# EAGLE board NCP1402-5V_Breakout-Panel-v10 (EAGLE 6.5.0), part 1 of 2
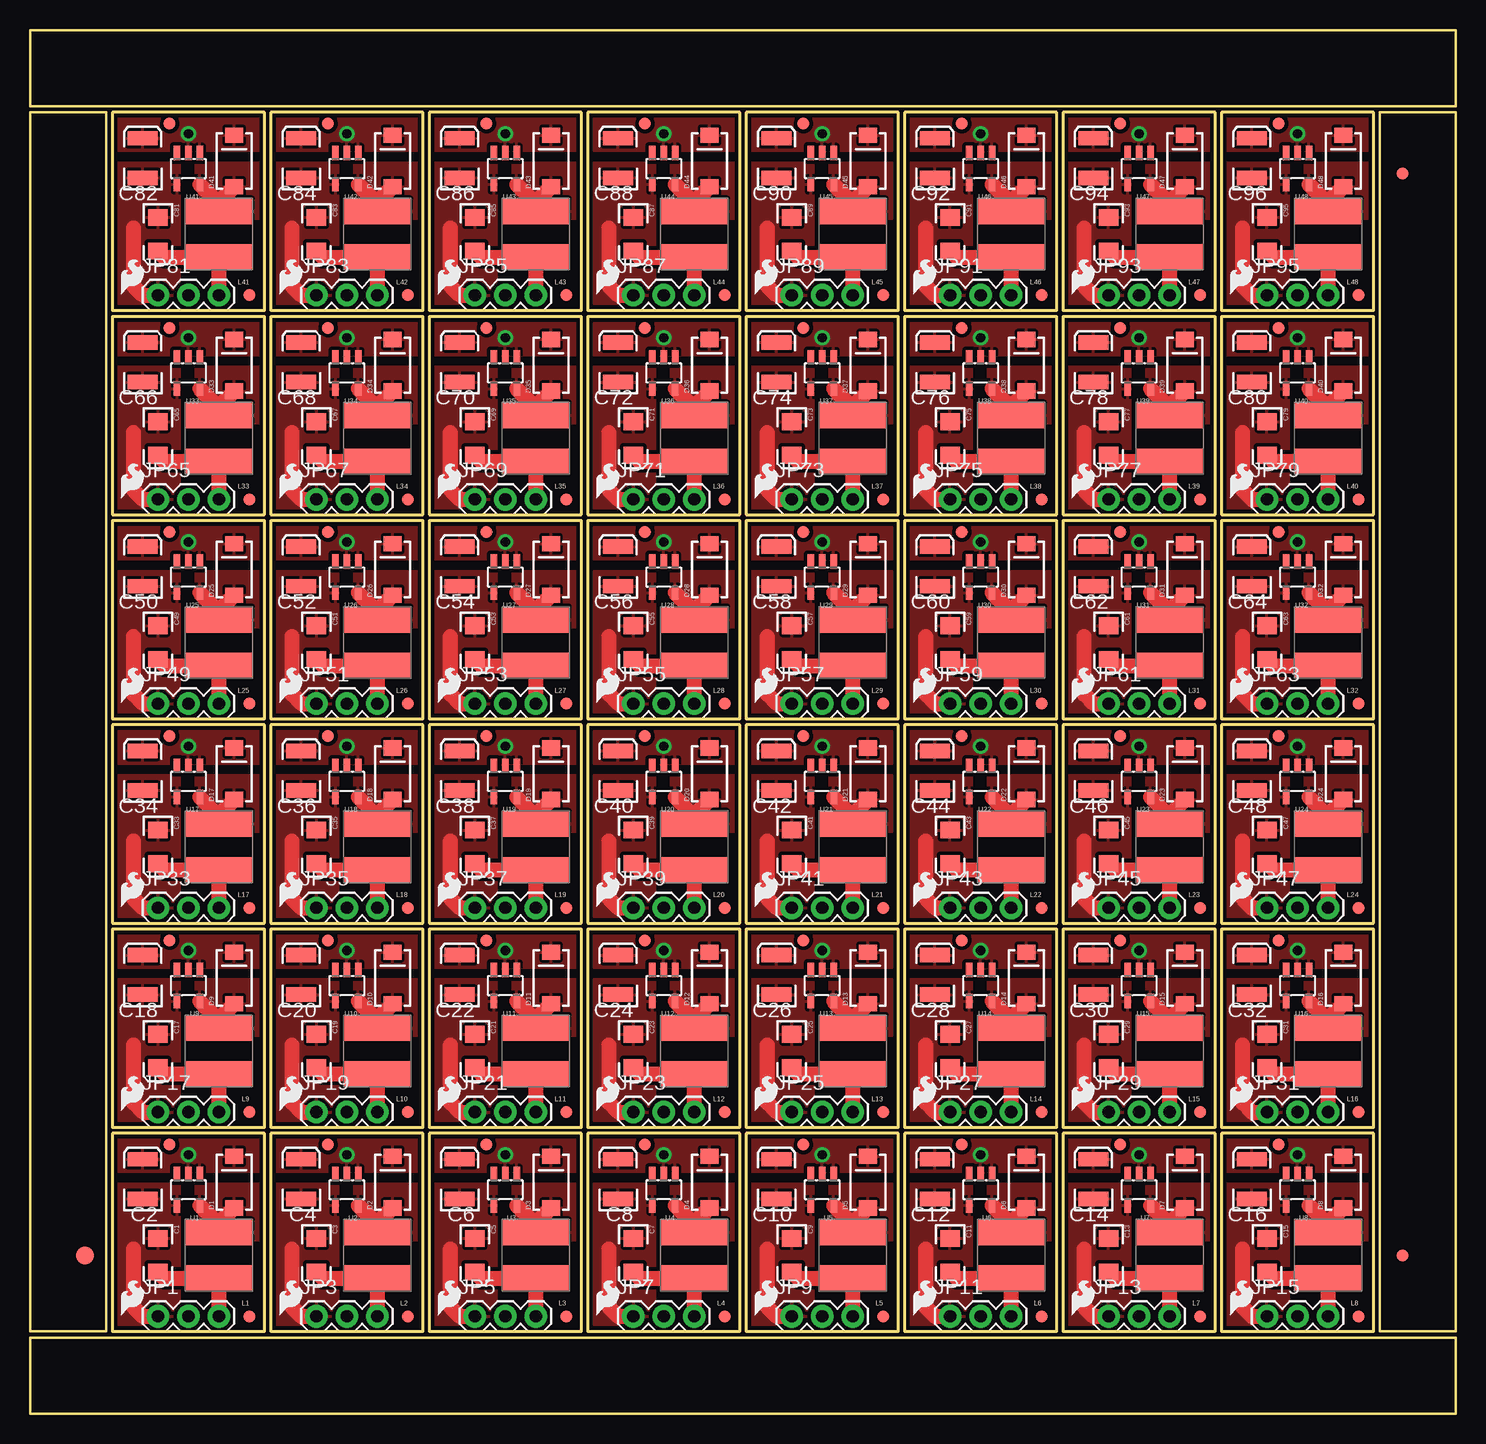
[diagram p0: board, top side]
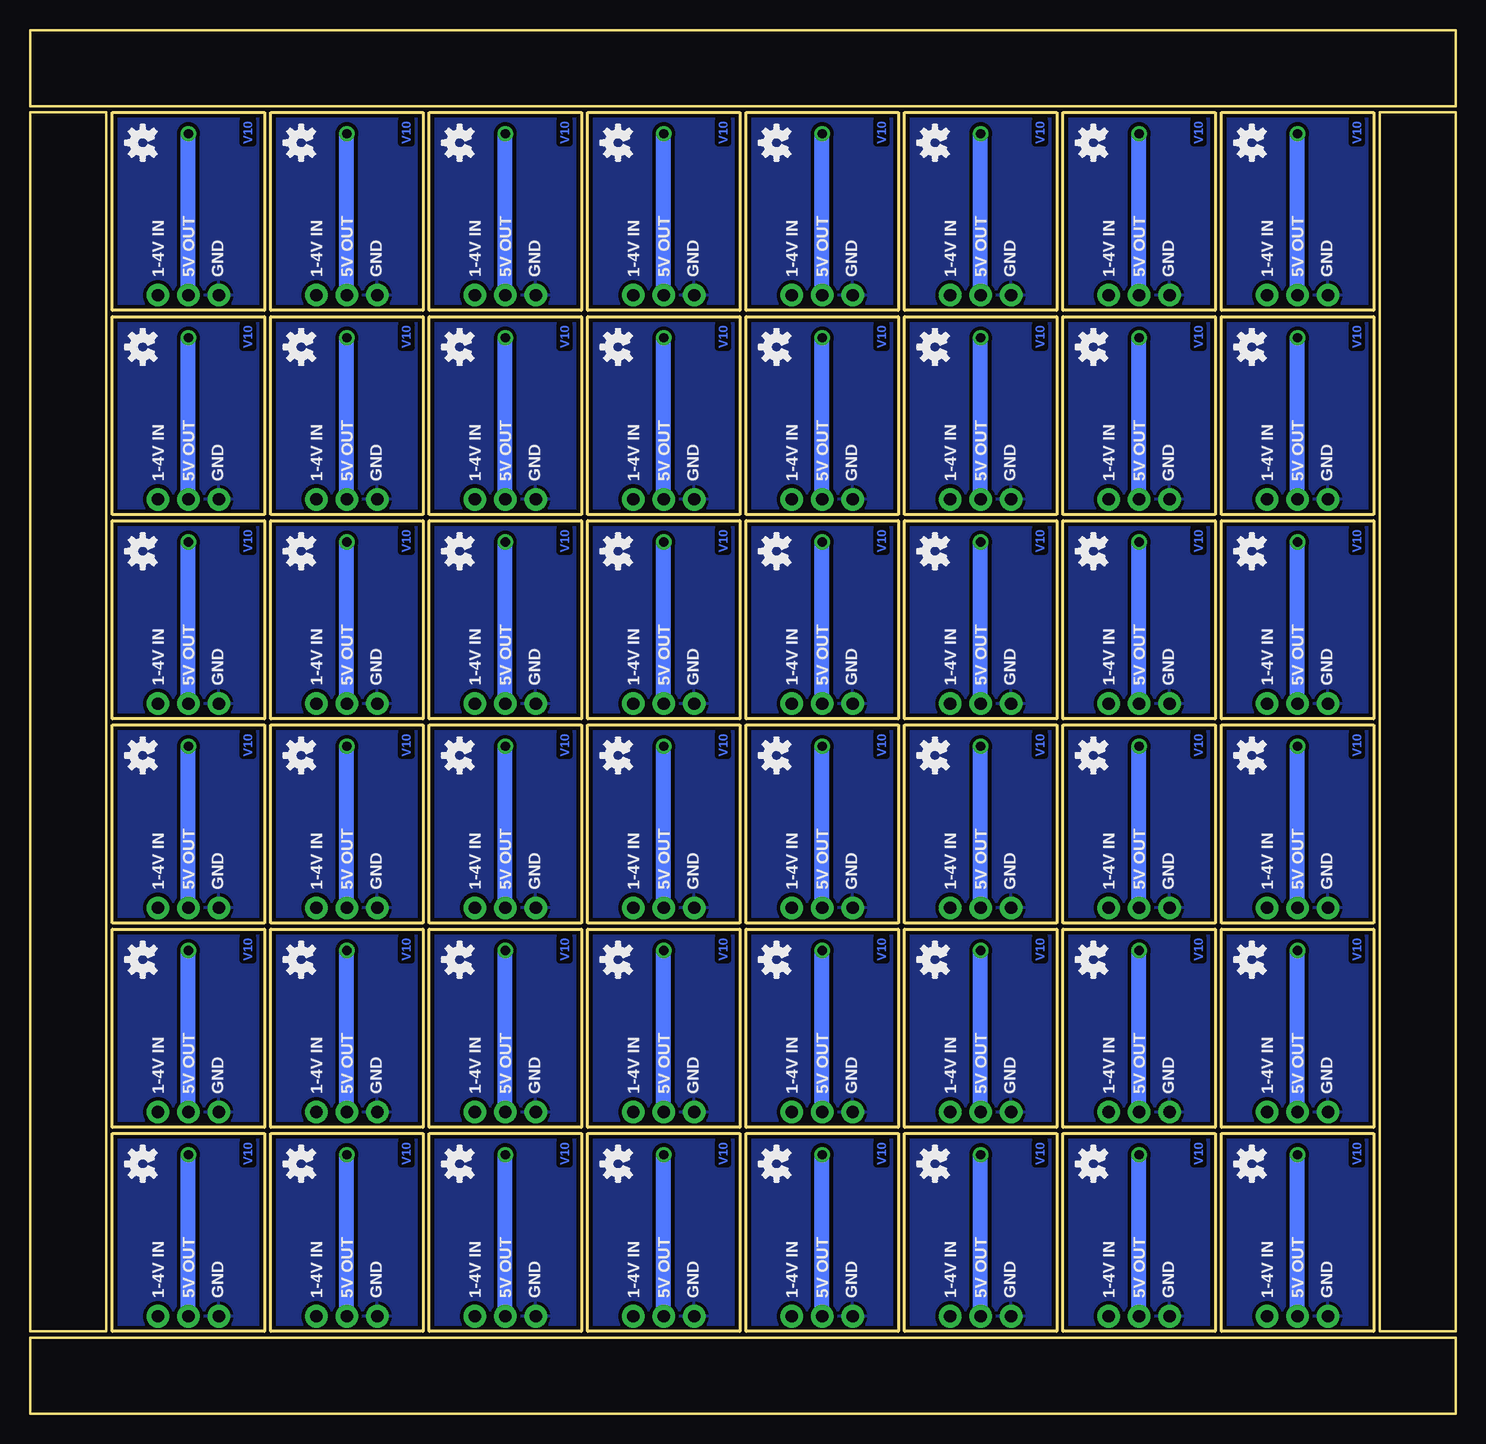
[diagram p1: board, bottom side, seen from below]

Size 118.87 x 115.32 mm. Coordinates in mm from the lower left corner, seen from the top.
Outline: 6.86,6.86 19.56,6.86 19.56,23.37 6.86,23.37 6.86,6.86
Outline: 20.07,6.86 32.77,6.86 32.77,23.37 20.07,23.37 20.07,6.86
Outline: 33.27,6.86 45.97,6.86 45.97,23.37 33.27,23.37 33.27,6.86
Outline: 46.48,6.86 59.18,6.86 59.18,23.37 46.48,23.37 46.48,6.86
Outline: 59.69,6.86 72.39,6.86 72.39,23.37 59.69,23.37 59.69,6.86
Outline: 72.9,6.86 85.6,6.86 85.6,23.37 72.9,23.37 72.9,6.86
Outline: 86.11,6.86 98.81,6.86 98.81,23.37 86.11,23.37 86.11,6.86
Outline: 99.31,6.86 112.01,6.86 112.01,23.37 99.31,23.37 99.31,6.86
Outline: 6.86,23.88 19.56,23.88 19.56,40.39 6.86,40.39 6.86,23.88
Outline: 20.07,23.88 32.77,23.88 32.77,40.39 20.07,40.39 20.07,23.88
Outline: 33.27,23.88 45.97,23.88 45.97,40.39 33.27,40.39 33.27,23.88
Outline: 46.48,23.88 59.18,23.88 59.18,40.39 46.48,40.39 46.48,23.88
Outline: 59.69,23.88 72.39,23.88 72.39,40.39 59.69,40.39 59.69,23.88
Outline: 72.9,23.88 85.6,23.88 85.6,40.39 72.9,40.39 72.9,23.88
Outline: 86.11,23.88 98.81,23.88 98.81,40.39 86.11,40.39 86.11,23.88
Outline: 99.31,23.88 112.01,23.88 112.01,40.39 99.31,40.39 99.31,23.88
Outline: 6.86,40.89 19.56,40.89 19.56,57.4 6.86,57.4 6.86,40.89
Outline: 20.07,40.89 32.77,40.89 32.77,57.4 20.07,57.4 20.07,40.89
Outline: 33.27,40.89 45.97,40.89 45.97,57.4 33.27,57.4 33.27,40.89
Outline: 46.48,40.89 59.18,40.89 59.18,57.4 46.48,57.4 46.48,40.89
Outline: 59.69,40.89 72.39,40.89 72.39,57.4 59.69,57.4 59.69,40.89
Outline: 72.9,40.89 85.6,40.89 85.6,57.4 72.9,57.4 72.9,40.89
Outline: 86.11,40.89 98.81,40.89 98.81,57.4 86.11,57.4 86.11,40.89
Outline: 99.31,40.89 112.01,40.89 112.01,57.4 99.31,57.4 99.31,40.89
Outline: 6.86,57.91 19.56,57.91 19.56,74.42 6.86,74.42 6.86,57.91
Outline: 20.07,57.91 32.77,57.91 32.77,74.42 20.07,74.42 20.07,57.91
Outline: 33.27,57.91 45.97,57.91 45.97,74.42 33.27,74.42 33.27,57.91
Outline: 46.48,57.91 59.18,57.91 59.18,74.42 46.48,74.42 46.48,57.91
Outline: 59.69,57.91 72.39,57.91 72.39,74.42 59.69,74.42 59.69,57.91
Outline: 72.9,57.91 85.6,57.91 85.6,74.42 72.9,74.42 72.9,57.91
Outline: 86.11,57.91 98.81,57.91 98.81,74.42 86.11,74.42 86.11,57.91
Outline: 99.31,57.91 112.01,57.91 112.01,74.42 99.31,74.42 99.31,57.91
Outline: 6.86,74.93 19.56,74.93 19.56,91.44 6.86,91.44 6.86,74.93
Outline: 20.07,74.93 32.77,74.93 32.77,91.44 20.07,91.44 20.07,74.93
Outline: 33.27,74.93 45.97,74.93 45.97,91.44 33.27,91.44 33.27,74.93
Outline: 46.48,74.93 59.18,74.93 59.18,91.44 46.48,91.44 46.48,74.93
Outline: 59.69,74.93 72.39,74.93 72.39,91.44 59.69,91.44 59.69,74.93
Outline: 72.9,74.93 85.6,74.93 85.6,91.44 72.9,91.44 72.9,74.93
Outline: 86.11,74.93 98.81,74.93 98.81,91.44 86.11,91.44 86.11,74.93
Outline: 99.31,74.93 112.01,74.93 112.01,91.44 99.31,91.44 99.31,74.93
Outline: 6.86,91.95 19.56,91.95 19.56,108.46 6.86,108.46 6.86,91.95
Outline: 20.07,91.95 32.77,91.95 32.77,108.46 20.07,108.46 20.07,91.95
Outline: 33.27,91.95 45.97,91.95 45.97,108.46 33.27,108.46 33.27,91.95
Outline: 46.48,91.95 59.18,91.95 59.18,108.46 46.48,108.46 46.48,91.95
Outline: 59.69,91.95 72.39,91.95 72.39,108.46 59.69,108.46 59.69,91.95
Outline: 72.9,91.95 85.6,91.95 85.6,108.46 72.9,108.46 72.9,91.95
Outline: 86.11,91.95 98.81,91.95 98.81,108.46 86.11,108.46 86.11,91.95
Outline: 99.31,91.95 112.01,91.95 112.01,108.46 99.31,108.46 99.31,91.95
Outline: 6.35,6.86 6.35,108.46 0,108.46 0,6.86 6.35,6.86
Outline: 0,0 118.87,0 118.87,6.35 0,6.35 0,0
Outline: 118.87,6.86 118.87,108.46 112.52,108.46 112.52,6.86 118.87,6.86
Outline: 118.87,115.32 0,115.32 0,108.97 118.87,108.97 118.87,115.32
Copper layers (1*16): Top 0.035mm / dielectric 1.5mm / Bottom 0.035mm
Design rules "SparkFun *": minimum track width 8mil, minimum drill 20mil, track to track 8mil, track to pad 8mil, pad to pad 8mil, via to via 8mil, smd to smd 8mil, copper to edge 8mil, drill to drill 8mil, minimum pad ring 12mil, minimum via ring 10mil, stop-mask expansion 4mil, vias tented up to drill 31mil, thermal gap 10mil

## Footprints (pad centres in the part's own frame; a part is rotated, then mirrored left to right if it is on the bottom)
EIA3216 = smd 1.4 x 1.6: A 1.4,0; C -1.4,0
EIA3528 = smd 1.2 x 2.5: A 1.65,0; C -1.65,0
SMA-DIODE = smd 1.27 x 1.47: A -2.15,0; C 2.15,0
FIDUCIAL-1.5X3 = smd 1.5 x 1.5: 1 0,0
FIDUCIAL-1X2 = smd 1 x 1: 1 0,0
1X03 = drill 1.016 pad 1.88: 1 0,0; 2 2.54,0; 3 5.08,0
CR54 = smd 5.5 x 2.15: P$1 0,1.92; P$2 0,-1.92
SOT23-5 = smd 0.55 x 1.2: 1 -0.95,-1.3; 2 0,-1.3; 3 0.95,-1.3; 4 0.95,1.3; 5 -0.95,1.3

## Placement (x,y rotation side)
C1  10uF  [EIA3216]  10.67,13.21 270 top
C2  68uF  [EIA3528]  9.4,19.56 90 top
C3  10uF  [EIA3216]  23.88,13.21 270 top
C4  68uF  [EIA3528]  22.61,19.56 90 top
C5  10uF  [EIA3216]  37.08,13.21 270 top
C6  68uF  [EIA3528]  35.81,19.56 90 top
C7  10uF  [EIA3216]  50.29,13.21 270 top
C8  68uF  [EIA3528]  49.02,19.56 90 top
C9  10uF  [EIA3216]  63.5,13.21 270 top
C10  68uF  [EIA3528]  62.23,19.56 90 top
C11  10uF  [EIA3216]  76.71,13.21 270 top
C12  68uF  [EIA3528]  75.44,19.56 90 top
C13  10uF  [EIA3216]  89.92,13.21 270 top
C14  68uF  [EIA3528]  88.65,19.56 90 top
C15  10uF  [EIA3216]  103.12,13.21 270 top
C16  68uF  [EIA3528]  101.85,19.56 90 top
C17  10uF  [EIA3216]  10.67,30.23 270 top
C18  68uF  [EIA3528]  9.4,36.58 90 top
C19  10uF  [EIA3216]  23.88,30.23 270 top
C20  68uF  [EIA3528]  22.61,36.58 90 top
C21  10uF  [EIA3216]  37.08,30.23 270 top
C22  68uF  [EIA3528]  35.81,36.58 90 top
C23  10uF  [EIA3216]  50.29,30.23 270 top
C24  68uF  [EIA3528]  49.02,36.58 90 top
C25  10uF  [EIA3216]  63.5,30.23 270 top
C26  68uF  [EIA3528]  62.23,36.58 90 top
C27  10uF  [EIA3216]  76.71,30.23 270 top
C28  68uF  [EIA3528]  75.44,36.58 90 top
C29  10uF  [EIA3216]  89.92,30.23 270 top
C30  68uF  [EIA3528]  88.65,36.58 90 top
C31  10uF  [EIA3216]  103.12,30.23 270 top
C32  68uF  [EIA3528]  101.85,36.58 90 top
C33  10uF  [EIA3216]  10.67,47.24 270 top
C34  68uF  [EIA3528]  9.4,53.59 90 top
C35  10uF  [EIA3216]  23.88,47.24 270 top
C36  68uF  [EIA3528]  22.61,53.59 90 top
C37  10uF  [EIA3216]  37.08,47.24 270 top
C38  68uF  [EIA3528]  35.81,53.59 90 top
C39  10uF  [EIA3216]  50.29,47.24 270 top
C40  68uF  [EIA3528]  49.02,53.59 90 top
C41  10uF  [EIA3216]  63.5,47.24 270 top
C42  68uF  [EIA3528]  62.23,53.59 90 top
C43  10uF  [EIA3216]  76.71,47.24 270 top
C44  68uF  [EIA3528]  75.44,53.59 90 top
C45  10uF  [EIA3216]  89.92,47.24 270 top
C46  68uF  [EIA3528]  88.65,53.59 90 top
C47  10uF  [EIA3216]  103.12,47.24 270 top
C48  68uF  [EIA3528]  101.85,53.59 90 top
C49  10uF  [EIA3216]  10.67,64.26 270 top
C50  68uF  [EIA3528]  9.4,70.61 90 top
C51  10uF  [EIA3216]  23.88,64.26 270 top
C52  68uF  [EIA3528]  22.61,70.61 90 top
C53  10uF  [EIA3216]  37.08,64.26 270 top
C54  68uF  [EIA3528]  35.81,70.61 90 top
C55  10uF  [EIA3216]  50.29,64.26 270 top
C56  68uF  [EIA3528]  49.02,70.61 90 top
C57  10uF  [EIA3216]  63.5,64.26 270 top
C58  68uF  [EIA3528]  62.23,70.61 90 top
C59  10uF  [EIA3216]  76.71,64.26 270 top
C60  68uF  [EIA3528]  75.44,70.61 90 top
C61  10uF  [EIA3216]  89.92,64.26 270 top
C62  68uF  [EIA3528]  88.65,70.61 90 top
C63  10uF  [EIA3216]  103.12,64.26 270 top
C64  68uF  [EIA3528]  101.85,70.61 90 top
C65  10uF  [EIA3216]  10.67,81.28 270 top
C66  68uF  [EIA3528]  9.4,87.63 90 top
C67  10uF  [EIA3216]  23.88,81.28 270 top
C68  68uF  [EIA3528]  22.61,87.63 90 top
C69  10uF  [EIA3216]  37.08,81.28 270 top
C70  68uF  [EIA3528]  35.81,87.63 90 top
C71  10uF  [EIA3216]  50.29,81.28 270 top
C72  68uF  [EIA3528]  49.02,87.63 90 top
C73  10uF  [EIA3216]  63.5,81.28 270 top
C74  68uF  [EIA3528]  62.23,87.63 90 top
C75  10uF  [EIA3216]  76.71,81.28 270 top
C76  68uF  [EIA3528]  75.44,87.63 90 top
C77  10uF  [EIA3216]  89.92,81.28 270 top
C78  68uF  [EIA3528]  88.65,87.63 90 top
C79  10uF  [EIA3216]  103.12,81.28 270 top
C80  68uF  [EIA3528]  101.85,87.63 90 top
C81  10uF  [EIA3216]  10.67,98.3 270 top
C82  68uF  [EIA3528]  9.4,104.65 90 top
C83  10uF  [EIA3216]  23.88,98.3 270 top
C84  68uF  [EIA3528]  22.61,104.65 90 top
C85  10uF  [EIA3216]  37.08,98.3 270 top
C86  68uF  [EIA3528]  35.81,104.65 90 top
C87  10uF  [EIA3216]  50.29,98.3 270 top
C88  68uF  [EIA3528]  49.02,104.65 90 top
C89  10uF  [EIA3216]  63.5,98.3 270 top
C90  68uF  [EIA3528]  62.23,104.65 90 top
C91  10uF  [EIA3216]  76.71,98.3 270 top
C92  68uF  [EIA3528]  75.44,104.65 90 top
C93  10uF  [EIA3216]  89.92,98.3 270 top
C94  68uF  [EIA3528]  88.65,104.65 90 top
C95  10uF  [EIA3216]  103.12,98.3 270 top
C96  68uF  [EIA3528]  101.85,104.65 90 top
D1  MBRA140  [SMA-DIODE]  17.02,19.3 90 top
D2  MBRA140  [SMA-DIODE]  30.23,19.3 90 top
D3  MBRA140  [SMA-DIODE]  43.43,19.3 90 top
D4  MBRA140  [SMA-DIODE]  56.64,19.3 90 top
D5  MBRA140  [SMA-DIODE]  69.85,19.3 90 top
D6  MBRA140  [SMA-DIODE]  83.06,19.3 90 top
D7  MBRA140  [SMA-DIODE]  96.27,19.3 90 top
D8  MBRA140  [SMA-DIODE]  109.47,19.3 90 top
D9  MBRA140  [SMA-DIODE]  17.02,36.32 90 top
D10  MBRA140  [SMA-DIODE]  30.23,36.32 90 top
D11  MBRA140  [SMA-DIODE]  43.43,36.32 90 top
D12  MBRA140  [SMA-DIODE]  56.64,36.32 90 top
D13  MBRA140  [SMA-DIODE]  69.85,36.32 90 top
D14  MBRA140  [SMA-DIODE]  83.06,36.32 90 top
D15  MBRA140  [SMA-DIODE]  96.27,36.32 90 top
D16  MBRA140  [SMA-DIODE]  109.47,36.32 90 top
D17  MBRA140  [SMA-DIODE]  17.02,53.34 90 top
D18  MBRA140  [SMA-DIODE]  30.23,53.34 90 top
D19  MBRA140  [SMA-DIODE]  43.43,53.34 90 top
D20  MBRA140  [SMA-DIODE]  56.64,53.34 90 top
D21  MBRA140  [SMA-DIODE]  69.85,53.34 90 top
D22  MBRA140  [SMA-DIODE]  83.06,53.34 90 top
D23  MBRA140  [SMA-DIODE]  96.27,53.34 90 top
D24  MBRA140  [SMA-DIODE]  109.47,53.34 90 top
D25  MBRA140  [SMA-DIODE]  17.02,70.36 90 top
D26  MBRA140  [SMA-DIODE]  30.23,70.36 90 top
D27  MBRA140  [SMA-DIODE]  43.43,70.36 90 top
D28  MBRA140  [SMA-DIODE]  56.64,70.36 90 top
D29  MBRA140  [SMA-DIODE]  69.85,70.36 90 top
D30  MBRA140  [SMA-DIODE]  83.06,70.36 90 top
D31  MBRA140  [SMA-DIODE]  96.27,70.36 90 top
D32  MBRA140  [SMA-DIODE]  109.47,70.36 90 top
D33  MBRA140  [SMA-DIODE]  17.02,87.38 90 top
D34  MBRA140  [SMA-DIODE]  30.23,87.38 90 top
D35  MBRA140  [SMA-DIODE]  43.43,87.38 90 top
D36  MBRA140  [SMA-DIODE]  56.64,87.38 90 top
D37  MBRA140  [SMA-DIODE]  69.85,87.38 90 top
D38  MBRA140  [SMA-DIODE]  83.06,87.38 90 top
D39  MBRA140  [SMA-DIODE]  96.27,87.38 90 top
D40  MBRA140  [SMA-DIODE]  109.47,87.38 90 top
D41  MBRA140  [SMA-DIODE]  17.02,104.39 90 top
D42  MBRA140  [SMA-DIODE]  30.23,104.39 90 top
D43  MBRA140  [SMA-DIODE]  43.43,104.39 90 top
D44  MBRA140  [SMA-DIODE]  56.64,104.39 90 top
D45  MBRA140  [SMA-DIODE]  69.85,104.39 90 top
D46  MBRA140  [SMA-DIODE]  83.06,104.39 90 top
D47  MBRA140  [SMA-DIODE]  96.27,104.39 90 top
D48  MBRA140  [SMA-DIODE]  109.47,104.39 90 top
E$1  [FIDUCIAL-1.5X3]  4.57,13.21 0 top
E$4  [FIDUCIAL-1X2]  114.43,13.21 0 top
E$5  [FIDUCIAL-1X2]  114.43,103.38 180 top
FID1  FIDUCIAL1X2  [FIDUCIAL-1X2]  18.29,8.13 0 top
FID2  FIDUCIAL1X2  [FIDUCIAL-1X2]  11.63,22.43 0 top
FID3  FIDUCIAL1X2  [FIDUCIAL-1X2]  31.5,8.13 0 top
FID4  FIDUCIAL1X2  [FIDUCIAL-1X2]  24.84,22.43 0 top
FID5  FIDUCIAL1X2  [FIDUCIAL-1X2]  44.7,8.13 0 top
FID6  FIDUCIAL1X2  [FIDUCIAL-1X2]  38.05,22.43 0 top
FID7  FIDUCIAL1X2  [FIDUCIAL-1X2]  57.91,8.13 0 top
FID8  FIDUCIAL1X2  [FIDUCIAL-1X2]  51.26,22.43 0 top
FID9  FIDUCIAL1X2  [FIDUCIAL-1X2]  71.12,8.13 0 top
FID10  FIDUCIAL1X2  [FIDUCIAL-1X2]  64.47,22.43 0 top
FID11  FIDUCIAL1X2  [FIDUCIAL-1X2]  84.33,8.13 0 top
FID12  FIDUCIAL1X2  [FIDUCIAL-1X2]  77.67,22.43 0 top
FID13  FIDUCIAL1X2  [FIDUCIAL-1X2]  97.54,8.13 0 top
FID14  FIDUCIAL1X2  [FIDUCIAL-1X2]  90.88,22.43 0 top
FID15  FIDUCIAL1X2  [FIDUCIAL-1X2]  110.74,8.13 0 top
FID16  FIDUCIAL1X2  [FIDUCIAL-1X2]  104.09,22.43 0 top
FID17  FIDUCIAL1X2  [FIDUCIAL-1X2]  18.29,25.15 0 top
FID18  FIDUCIAL1X2  [FIDUCIAL-1X2]  11.63,39.45 0 top
FID19  FIDUCIAL1X2  [FIDUCIAL-1X2]  31.5,25.15 0 top
FID20  FIDUCIAL1X2  [FIDUCIAL-1X2]  24.84,39.45 0 top
FID21  FIDUCIAL1X2  [FIDUCIAL-1X2]  44.7,25.15 0 top
FID22  FIDUCIAL1X2  [FIDUCIAL-1X2]  38.05,39.45 0 top
FID23  FIDUCIAL1X2  [FIDUCIAL-1X2]  57.91,25.15 0 top
FID24  FIDUCIAL1X2  [FIDUCIAL-1X2]  51.26,39.45 0 top
FID25  FIDUCIAL1X2  [FIDUCIAL-1X2]  71.12,25.15 0 top
FID26  FIDUCIAL1X2  [FIDUCIAL-1X2]  64.47,39.45 0 top
FID27  FIDUCIAL1X2  [FIDUCIAL-1X2]  84.33,25.15 0 top
FID28  FIDUCIAL1X2  [FIDUCIAL-1X2]  77.67,39.45 0 top
FID29  FIDUCIAL1X2  [FIDUCIAL-1X2]  97.54,25.15 0 top
FID30  FIDUCIAL1X2  [FIDUCIAL-1X2]  90.88,39.45 0 top
FID31  FIDUCIAL1X2  [FIDUCIAL-1X2]  110.74,25.15 0 top
FID32  FIDUCIAL1X2  [FIDUCIAL-1X2]  104.09,39.45 0 top
FID33  FIDUCIAL1X2  [FIDUCIAL-1X2]  18.29,42.16 0 top
FID34  FIDUCIAL1X2  [FIDUCIAL-1X2]  11.63,56.46 0 top
FID35  FIDUCIAL1X2  [FIDUCIAL-1X2]  31.5,42.16 0 top
FID36  FIDUCIAL1X2  [FIDUCIAL-1X2]  24.84,56.46 0 top
FID37  FIDUCIAL1X2  [FIDUCIAL-1X2]  44.7,42.16 0 top
FID38  FIDUCIAL1X2  [FIDUCIAL-1X2]  38.05,56.46 0 top
FID39  FIDUCIAL1X2  [FIDUCIAL-1X2]  57.91,42.16 0 top
FID40  FIDUCIAL1X2  [FIDUCIAL-1X2]  51.26,56.46 0 top
FID41  FIDUCIAL1X2  [FIDUCIAL-1X2]  71.12,42.16 0 top
FID42  FIDUCIAL1X2  [FIDUCIAL-1X2]  64.47,56.46 0 top
FID43  FIDUCIAL1X2  [FIDUCIAL-1X2]  84.33,42.16 0 top
FID44  FIDUCIAL1X2  [FIDUCIAL-1X2]  77.67,56.46 0 top
FID45  FIDUCIAL1X2  [FIDUCIAL-1X2]  97.54,42.16 0 top
FID46  FIDUCIAL1X2  [FIDUCIAL-1X2]  90.88,56.46 0 top
FID47  FIDUCIAL1X2  [FIDUCIAL-1X2]  110.74,42.16 0 top
FID48  FIDUCIAL1X2  [FIDUCIAL-1X2]  104.09,56.46 0 top
FID49  FIDUCIAL1X2  [FIDUCIAL-1X2]  18.29,59.18 0 top
FID50  FIDUCIAL1X2  [FIDUCIAL-1X2]  11.63,73.48 0 top
FID51  FIDUCIAL1X2  [FIDUCIAL-1X2]  31.5,59.18 0 top
FID52  FIDUCIAL1X2  [FIDUCIAL-1X2]  24.84,73.48 0 top
FID53  FIDUCIAL1X2  [FIDUCIAL-1X2]  44.7,59.18 0 top
FID54  FIDUCIAL1X2  [FIDUCIAL-1X2]  38.05,73.48 0 top
FID55  FIDUCIAL1X2  [FIDUCIAL-1X2]  57.91,59.18 0 top
FID56  FIDUCIAL1X2  [FIDUCIAL-1X2]  51.26,73.48 0 top
FID57  FIDUCIAL1X2  [FIDUCIAL-1X2]  71.12,59.18 0 top
FID58  FIDUCIAL1X2  [FIDUCIAL-1X2]  64.47,73.48 0 top
FID59  FIDUCIAL1X2  [FIDUCIAL-1X2]  84.33,59.18 0 top
FID60  FIDUCIAL1X2  [FIDUCIAL-1X2]  77.67,73.48 0 top
FID61  FIDUCIAL1X2  [FIDUCIAL-1X2]  97.54,59.18 0 top
FID62  FIDUCIAL1X2  [FIDUCIAL-1X2]  90.88,73.48 0 top
FID63  FIDUCIAL1X2  [FIDUCIAL-1X2]  110.74,59.18 0 top
FID64  FIDUCIAL1X2  [FIDUCIAL-1X2]  104.09,73.48 0 top
FID65  FIDUCIAL1X2  [FIDUCIAL-1X2]  18.29,76.2 0 top
FID66  FIDUCIAL1X2  [FIDUCIAL-1X2]  11.63,90.5 0 top
FID67  FIDUCIAL1X2  [FIDUCIAL-1X2]  31.5,76.2 0 top
FID68  FIDUCIAL1X2  [FIDUCIAL-1X2]  24.84,90.5 0 top
FID69  FIDUCIAL1X2  [FIDUCIAL-1X2]  44.7,76.2 0 top
FID70  FIDUCIAL1X2  [FIDUCIAL-1X2]  38.05,90.5 0 top
FID71  FIDUCIAL1X2  [FIDUCIAL-1X2]  57.91,76.2 0 top
FID72  FIDUCIAL1X2  [FIDUCIAL-1X2]  51.26,90.5 0 top
FID73  FIDUCIAL1X2  [FIDUCIAL-1X2]  71.12,76.2 0 top
FID74  FIDUCIAL1X2  [FIDUCIAL-1X2]  64.47,90.5 0 top
FID75  FIDUCIAL1X2  [FIDUCIAL-1X2]  84.33,76.2 0 top
FID76  FIDUCIAL1X2  [FIDUCIAL-1X2]  77.67,90.5 0 top
FID77  FIDUCIAL1X2  [FIDUCIAL-1X2]  97.54,76.2 0 top
FID78  FIDUCIAL1X2  [FIDUCIAL-1X2]  90.88,90.5 0 top
FID79  FIDUCIAL1X2  [FIDUCIAL-1X2]  110.74,76.2 0 top
FID80  FIDUCIAL1X2  [FIDUCIAL-1X2]  104.09,90.5 0 top
FID81  FIDUCIAL1X2  [FIDUCIAL-1X2]  18.29,93.22 0 top
FID82  FIDUCIAL1X2  [FIDUCIAL-1X2]  11.63,107.52 0 top
FID83  FIDUCIAL1X2  [FIDUCIAL-1X2]  31.5,93.22 0 top
FID84  FIDUCIAL1X2  [FIDUCIAL-1X2]  24.84,107.52 0 top
FID85  FIDUCIAL1X2  [FIDUCIAL-1X2]  44.7,93.22 0 top
FID86  FIDUCIAL1X2  [FIDUCIAL-1X2]  38.05,107.52 0 top
FID87  FIDUCIAL1X2  [FIDUCIAL-1X2]  57.91,93.22 0 top
FID88  FIDUCIAL1X2  [FIDUCIAL-1X2]  51.26,107.52 0 top
FID89  FIDUCIAL1X2  [FIDUCIAL-1X2]  71.12,93.22 0 top
FID90  FIDUCIAL1X2  [FIDUCIAL-1X2]  64.47,107.52 0 top
FID91  FIDUCIAL1X2  [FIDUCIAL-1X2]  84.33,93.22 0 top
FID92  FIDUCIAL1X2  [FIDUCIAL-1X2]  77.67,107.52 0 top
FID93  FIDUCIAL1X2  [FIDUCIAL-1X2]  97.54,93.22 0 top
FID94  FIDUCIAL1X2  [FIDUCIAL-1X2]  90.88,107.52 0 top
FID95  FIDUCIAL1X2  [FIDUCIAL-1X2]  110.74,93.22 0 top
FID96  FIDUCIAL1X2  [FIDUCIAL-1X2]  104.09,107.52 0 top
JP1  [1X03]  10.67,8.13 0 top
JP2  LOGO-SFESK  [SFE-LOGO-FLAME]  7.62,8.26 0 top
JP3  [1X03]  23.88,8.13 0 top
JP4  LOGO-SFESK  [SFE-LOGO-FLAME]  20.83,8.26 0 top
JP5  [1X03]  37.08,8.13 0 top
JP6  LOGO-SFESK  [SFE-LOGO-FLAME]  34.04,8.26 0 top
JP7  [1X03]  50.29,8.13 0 top
JP8  LOGO-SFESK  [SFE-LOGO-FLAME]  47.24,8.26 0 top
JP9  [1X03]  63.5,8.13 0 top
JP10  LOGO-SFESK  [SFE-LOGO-FLAME]  60.45,8.26 0 top
JP11  [1X03]  76.71,8.13 0 top
JP12  LOGO-SFESK  [SFE-LOGO-FLAME]  73.66,8.26 0 top
JP13  [1X03]  89.92,8.13 0 top
JP14  LOGO-SFESK  [SFE-LOGO-FLAME]  86.87,8.26 0 top
JP15  [1X03]  103.12,8.13 0 top
JP16  LOGO-SFESK  [SFE-LOGO-FLAME]  100.08,8.26 0 top
JP17  [1X03]  10.67,25.15 0 top
JP18  LOGO-SFESK  [SFE-LOGO-FLAME]  7.62,25.27 0 top
JP19  [1X03]  23.88,25.15 0 top
JP20  LOGO-SFESK  [SFE-LOGO-FLAME]  20.83,25.27 0 top
JP21  [1X03]  37.08,25.15 0 top
JP22  LOGO-SFESK  [SFE-LOGO-FLAME]  34.04,25.27 0 top
JP23  [1X03]  50.29,25.15 0 top
JP24  LOGO-SFESK  [SFE-LOGO-FLAME]  47.24,25.27 0 top
JP25  [1X03]  63.5,25.15 0 top
JP26  LOGO-SFESK  [SFE-LOGO-FLAME]  60.45,25.27 0 top
JP27  [1X03]  76.71,25.15 0 top
JP28  LOGO-SFESK  [SFE-LOGO-FLAME]  73.66,25.27 0 top
JP29  [1X03]  89.92,25.15 0 top
JP30  LOGO-SFESK  [SFE-LOGO-FLAME]  86.87,25.27 0 top
JP31  [1X03]  103.12,25.15 0 top
JP32  LOGO-SFESK  [SFE-LOGO-FLAME]  100.08,25.27 0 top
JP33  [1X03]  10.67,42.16 0 top
JP34  LOGO-SFESK  [SFE-LOGO-FLAME]  7.62,42.29 0 top
JP35  [1X03]  23.88,42.16 0 top
JP36  LOGO-SFESK  [SFE-LOGO-FLAME]  20.83,42.29 0 top
JP37  [1X03]  37.08,42.16 0 top
JP38  LOGO-SFESK  [SFE-LOGO-FLAME]  34.04,42.29 0 top
JP39  [1X03]  50.29,42.16 0 top
JP40  LOGO-SFESK  [SFE-LOGO-FLAME]  47.24,42.29 0 top
JP41  [1X03]  63.5,42.16 0 top
JP42  LOGO-SFESK  [SFE-LOGO-FLAME]  60.45,42.29 0 top
JP43  [1X03]  76.71,42.16 0 top
JP44  LOGO-SFESK  [SFE-LOGO-FLAME]  73.66,42.29 0 top
JP45  [1X03]  89.92,42.16 0 top
JP46  LOGO-SFESK  [SFE-LOGO-FLAME]  86.87,42.29 0 top
JP47  [1X03]  103.12,42.16 0 top
JP48  LOGO-SFESK  [SFE-LOGO-FLAME]  100.08,42.29 0 top
JP49  [1X03]  10.67,59.18 0 top
JP50  LOGO-SFESK  [SFE-LOGO-FLAME]  7.62,59.31 0 top
JP51  [1X03]  23.88,59.18 0 top
JP52  LOGO-SFESK  [SFE-LOGO-FLAME]  20.83,59.31 0 top
JP53  [1X03]  37.08,59.18 0 top
JP54  LOGO-SFESK  [SFE-LOGO-FLAME]  34.04,59.31 0 top
JP55  [1X03]  50.29,59.18 0 top
JP56  LOGO-SFESK  [SFE-LOGO-FLAME]  47.24,59.31 0 top
JP57  [1X03]  63.5,59.18 0 top
JP58  LOGO-SFESK  [SFE-LOGO-FLAME]  60.45,59.31 0 top
JP59  [1X03]  76.71,59.18 0 top
JP60  LOGO-SFESK  [SFE-LOGO-FLAME]  73.66,59.31 0 top
JP61  [1X03]  89.92,59.18 0 top
JP62  LOGO-SFESK  [SFE-LOGO-FLAME]  86.87,59.31 0 top
JP63  [1X03]  103.12,59.18 0 top
JP64  LOGO-SFESK  [SFE-LOGO-FLAME]  100.08,59.31 0 top
JP65  [1X03]  10.67,76.2 0 top
JP66  LOGO-SFESK  [SFE-LOGO-FLAME]  7.62,76.33 0 top
JP67  [1X03]  23.88,76.2 0 top
JP68  LOGO-SFESK  [SFE-LOGO-FLAME]  20.83,76.33 0 top
JP69  [1X03]  37.08,76.2 0 top
JP70  LOGO-SFESK  [SFE-LOGO-FLAME]  34.04,76.33 0 top
JP71  [1X03]  50.29,76.2 0 top
JP72  LOGO-SFESK  [SFE-LOGO-FLAME]  47.24,76.33 0 top
JP73  [1X03]  63.5,76.2 0 top
JP74  LOGO-SFESK  [SFE-LOGO-FLAME]  60.45,76.33 0 top
JP75  [1X03]  76.71,76.2 0 top
JP76  LOGO-SFESK  [SFE-LOGO-FLAME]  73.66,76.33 0 top
JP77  [1X03]  89.92,76.2 0 top
JP78  LOGO-SFESK  [SFE-LOGO-FLAME]  86.87,76.33 0 top
JP79  [1X03]  103.12,76.2 0 top
JP80  LOGO-SFESK  [SFE-LOGO-FLAME]  100.08,76.33 0 top
JP81  [1X03]  10.67,93.22 0 top
JP82  LOGO-SFESK  [SFE-LOGO-FLAME]  7.62,93.34 0 top
JP83  [1X03]  23.88,93.22 0 top
JP84  LOGO-SFESK  [SFE-LOGO-FLAME]  20.83,93.34 0 top
JP85  [1X03]  37.08,93.22 0 top
JP86  LOGO-SFESK  [SFE-LOGO-FLAME]  34.04,93.34 0 top
JP87  [1X03]  50.29,93.22 0 top
JP88  LOGO-SFESK  [SFE-LOGO-FLAME]  47.24,93.34 0 top
JP89  [1X03]  63.5,93.22 0 top
JP90  LOGO-SFESK  [SFE-LOGO-FLAME]  60.45,93.34 0 top
JP91  [1X03]  76.71,93.22 0 top
JP92  LOGO-SFESK  [SFE-LOGO-FLAME]  73.66,93.34 0 top
JP93  [1X03]  89.92,93.22 0 top
JP94  LOGO-SFESK  [SFE-LOGO-FLAME]  86.87,93.34 0 top
JP95  [1X03]  103.12,93.22 0 top
JP96  LOGO-SFESK  [SFE-LOGO-FLAME]  100.08,93.34 0 top
L1  47uH  [CR54]  15.75,13.21 180 top
L2  47uH  [CR54]  28.96,13.21 180 top
L3  47uH  [CR54]  42.16,13.21 180 top
L4  47uH  [CR54]  55.37,13.21 180 top
L5  47uH  [CR54]  68.58,13.21 180 top
L6  47uH  [CR54]  81.79,13.21 180 top
L7  47uH  [CR54]  95,13.21 180 top
L8  47uH  [CR54]  108.2,13.21 180 top
L9  47uH  [CR54]  15.75,30.23 180 top
L10  47uH  [CR54]  28.96,30.23 180 top
L11  47uH  [CR54]  42.16,30.23 180 top
L12  47uH  [CR54]  55.37,30.23 180 top
L13  47uH  [CR54]  68.58,30.23 180 top
L14  47uH  [CR54]  81.79,30.23 180 top
L15  47uH  [CR54]  95,30.23 180 top
L16  47uH  [CR54]  108.2,30.23 180 top
L17  47uH  [CR54]  15.75,47.24 180 top
L18  47uH  [CR54]  28.96,47.24 180 top
L19  47uH  [CR54]  42.16,47.24 180 top
L20  47uH  [CR54]  55.37,47.24 180 top
L21  47uH  [CR54]  68.58,47.24 180 top
L22  47uH  [CR54]  81.79,47.24 180 top
L23  47uH  [CR54]  95,47.24 180 top
L24  47uH  [CR54]  108.2,47.24 180 top
L25  47uH  [CR54]  15.75,64.26 180 top
L26  47uH  [CR54]  28.96,64.26 180 top
L27  47uH  [CR54]  42.16,64.26 180 top
L28  47uH  [CR54]  55.37,64.26 180 top
L29  47uH  [CR54]  68.58,64.26 180 top
L30  47uH  [CR54]  81.79,64.26 180 top
L31  47uH  [CR54]  95,64.26 180 top
L32  47uH  [CR54]  108.2,64.26 180 top
L33  47uH  [CR54]  15.75,81.28 180 top
L34  47uH  [CR54]  28.96,81.28 180 top
L35  47uH  [CR54]  42.16,81.28 180 top
L36  47uH  [CR54]  55.37,81.28 180 top
L37  47uH  [CR54]  68.58,81.28 180 top
L38  47uH  [CR54]  81.79,81.28 180 top
L39  47uH  [CR54]  95,81.28 180 top
L40  47uH  [CR54]  108.2,81.28 180 top
L41  47uH  [CR54]  15.75,98.3 180 top
L42  47uH  [CR54]  28.96,98.3 180 top
L43  47uH  [CR54]  42.16,98.3 180 top
L44  47uH  [CR54]  55.37,98.3 180 top
L45  47uH  [CR54]  68.58,98.3 180 top
L46  47uH  [CR54]  81.79,98.3 180 top
L47  47uH  [CR54]  95,98.3 180 top
L48  47uH  [CR54]  108.2,98.3 180 top
U1  NCP1402  [SOT23-5]  13.21,18.67 180 top
U2  NCP1402  [SOT23-5]  26.42,18.67 180 top
U3  NCP1402  [SOT23-5]  39.62,18.67 180 top
U4  NCP1402  [SOT23-5]  52.83,18.67 180 top
U5  NCP1402  [SOT23-5]  66.04,18.67 180 top
U6  NCP1402  [SOT23-5]  79.25,18.67 180 top
U7  NCP1402  [SOT23-5]  92.46,18.67 180 top
U8  NCP1402  [SOT23-5]  105.66,18.67 180 top
U9  NCP1402  [SOT23-5]  13.21,35.69 180 top
U10  NCP1402  [SOT23-5]  26.42,35.69 180 top
U11  NCP1402  [SOT23-5]  39.62,35.69 180 top
U12  NCP1402  [SOT23-5]  52.83,35.69 180 top
U13  NCP1402  [SOT23-5]  66.04,35.69 180 top
U14  NCP1402  [SOT23-5]  79.25,35.69 180 top
U15  NCP1402  [SOT23-5]  92.46,35.69 180 top
U16  NCP1402  [SOT23-5]  105.66,35.69 180 top
U17  NCP1402  [SOT23-5]  13.21,52.7 180 top
U18  NCP1402  [SOT23-5]  26.42,52.7 180 top
U19  NCP1402  [SOT23-5]  39.62,52.7 180 top
U20  NCP1402  [SOT23-5]  52.83,52.7 180 top
U21  NCP1402  [SOT23-5]  66.04,52.7 180 top
U22  NCP1402  [SOT23-5]  79.25,52.7 180 top
U23  NCP1402  [SOT23-5]  92.46,52.7 180 top
U24  NCP1402  [SOT23-5]  105.66,52.7 180 top
U25  NCP1402  [SOT23-5]  13.21,69.72 180 top
U26  NCP1402  [SOT23-5]  26.42,69.72 180 top
U27  NCP1402  [SOT23-5]  39.62,69.72 180 top
U28  NCP1402  [SOT23-5]  52.83,69.72 180 top
U29  NCP1402  [SOT23-5]  66.04,69.72 180 top
U30  NCP1402  [SOT23-5]  79.25,69.72 180 top
U31  NCP1402  [SOT23-5]  92.46,69.72 180 top
U32  NCP1402  [SOT23-5]  105.66,69.72 180 top
U33  NCP1402  [SOT23-5]  13.21,86.74 180 top
U34  NCP1402  [SOT23-5]  26.42,86.74 180 top
U35  NCP1402  [SOT23-5]  39.62,86.74 180 top
U36  NCP1402  [SOT23-5]  52.83,86.74 180 top
U37  NCP1402  [SOT23-5]  66.04,86.74 180 top
U38  NCP1402  [SOT23-5]  79.25,86.74 180 top
U39  NCP1402  [SOT23-5]  92.46,86.74 180 top
U40  NCP1402  [SOT23-5]  105.66,86.74 180 top
U41  NCP1402  [SOT23-5]  13.21,103.76 180 top
U42  NCP1402  [SOT23-5]  26.42,103.76 180 top
U43  NCP1402  [SOT23-5]  39.62,103.76 180 top
U44  NCP1402  [SOT23-5]  52.83,103.76 180 top
U45  NCP1402  [SOT23-5]  66.04,103.76 180 top
U46  NCP1402  [SOT23-5]  79.25,103.76 180 top
U47  NCP1402  [SOT23-5]  92.46,103.76 180 top
U48  NCP1402  [SOT23-5]  105.66,103.76 180 top
U$1  OSHW-LOGOS  [OSHW-LOGO-S]  17.02,20.83 90 bottom
U$2  OSHW-LOGOS  [OSHW-LOGO-S]  30.23,20.83 90 bottom
U$3  OSHW-LOGOS  [OSHW-LOGO-S]  43.43,20.83 90 bottom
U$4  OSHW-LOGOS  [OSHW-LOGO-S]  56.64,20.83 90 bottom
U$5  OSHW-LOGOS  [OSHW-LOGO-S]  69.85,20.83 90 bottom
U$6  OSHW-LOGOS  [OSHW-LOGO-S]  83.06,20.83 90 bottom
U$7  OSHW-LOGOS  [OSHW-LOGO-S]  96.27,20.83 90 bottom
U$8  OSHW-LOGOS  [OSHW-LOGO-S]  109.47,20.83 90 bottom
U$9  OSHW-LOGOS  [OSHW-LOGO-S]  17.02,37.85 90 bottom
U$10  OSHW-LOGOS  [OSHW-LOGO-S]  30.23,37.85 90 bottom
U$11  OSHW-LOGOS  [OSHW-LOGO-S]  43.43,37.85 90 bottom
U$12  OSHW-LOGOS  [OSHW-LOGO-S]  56.64,37.85 90 bottom
U$13  OSHW-LOGOS  [OSHW-LOGO-S]  69.85,37.85 90 bottom
U$14  OSHW-LOGOS  [OSHW-LOGO-S]  83.06,37.85 90 bottom
U$15  OSHW-LOGOS  [OSHW-LOGO-S]  96.27,37.85 90 bottom
U$16  OSHW-LOGOS  [OSHW-LOGO-S]  109.47,37.85 90 bottom
U$17  OSHW-LOGOS  [OSHW-LOGO-S]  17.02,54.86 90 bottom
U$18  OSHW-LOGOS  [OSHW-LOGO-S]  30.23,54.86 90 bottom
U$19  OSHW-LOGOS  [OSHW-LOGO-S]  43.43,54.86 90 bottom
U$20  OSHW-LOGOS  [OSHW-LOGO-S]  56.64,54.86 90 bottom
U$21  OSHW-LOGOS  [OSHW-LOGO-S]  69.85,54.86 90 bottom
U$22  OSHW-LOGOS  [OSHW-LOGO-S]  83.06,54.86 90 bottom
U$23  OSHW-LOGOS  [OSHW-LOGO-S]  96.27,54.86 90 bottom
U$24  OSHW-LOGOS  [OSHW-LOGO-S]  109.47,54.86 90 bottom
U$25  OSHW-LOGOS  [OSHW-LOGO-S]  17.02,71.88 90 bottom
U$26  OSHW-LOGOS  [OSHW-LOGO-S]  30.23,71.88 90 bottom
U$27  OSHW-LOGOS  [OSHW-LOGO-S]  43.43,71.88 90 bottom
U$28  OSHW-LOGOS  [OSHW-LOGO-S]  56.64,71.88 90 bottom
U$29  OSHW-LOGOS  [OSHW-LOGO-S]  69.85,71.88 90 bottom
U$30  OSHW-LOGOS  [OSHW-LOGO-S]  83.06,71.88 90 bottom
U$31  OSHW-LOGOS  [OSHW-LOGO-S]  96.27,71.88 90 bottom
U$32  OSHW-LOGOS  [OSHW-LOGO-S]  109.47,71.88 90 bottom
U$33  OSHW-LOGOS  [OSHW-LOGO-S]  17.02,88.9 90 bottom
U$34  OSHW-LOGOS  [OSHW-LOGO-S]  30.23,88.9 90 bottom
U$35  OSHW-LOGOS  [OSHW-LOGO-S]  43.43,88.9 90 bottom
U$36  OSHW-LOGOS  [OSHW-LOGO-S]  56.64,88.9 90 bottom
U$37  OSHW-LOGOS  [OSHW-LOGO-S]  69.85,88.9 90 bottom
U$38  OSHW-LOGOS  [OSHW-LOGO-S]  83.06,88.9 90 bottom
U$39  OSHW-LOGOS  [OSHW-LOGO-S]  96.27,88.9 90 bottom
U$40  OSHW-LOGOS  [OSHW-LOGO-S]  109.47,88.9 90 bottom
U$41  OSHW-LOGOS  [OSHW-LOGO-S]  17.02,105.92 90 bottom
U$42  OSHW-LOGOS  [OSHW-LOGO-S]  30.23,105.92 90 bottom
U$43  OSHW-LOGOS  [OSHW-LOGO-S]  43.43,105.92 90 bottom
U$44  OSHW-LOGOS  [OSHW-LOGO-S]  56.64,105.92 90 bottom
U$45  OSHW-LOGOS  [OSHW-LOGO-S]  69.85,105.92 90 bottom
U$46  OSHW-LOGOS  [OSHW-LOGO-S]  83.06,105.92 90 bottom
U$47  OSHW-LOGOS  [OSHW-LOGO-S]  96.27,105.92 90 bottom
U$48  OSHW-LOGOS  [OSHW-LOGO-S]  109.47,105.92 90 bottom

## Library data of the parts
C1-C96 D1-D48 JP2 JP4 JP6 JP8 JP10 JP12 JP14 JP16 JP18 JP20 JP22 JP24 JP26 JP28 JP30 JP32 JP34 JP36 JP38 JP40 JP42 JP44 JP46 JP48 JP50 JP52 JP54 JP56 JP58 JP60 JP62 JP64 JP66 JP68 JP70 JP72 JP74 JP76 JP78 JP80 JP82 JP84 JP86 JP88 JP90 JP92 JP94 JP96 L1-L48 U1-U48 U$1-U$48 = SparkFun
E$1 E$4 E$5 FID1-FID96 = SparkFun-Aesthetics
JP1 JP3 JP5 JP7 JP9 JP11 JP13 JP15 JP17 JP19 JP21 JP23 JP25 JP27 JP29 JP31 JP33 JP35 JP37 JP39 JP41 JP43 JP45 JP47 JP49 JP51 JP53 JP55 JP57 JP59 JP61 JP63 JP65 JP67 JP69 JP71 JP73 JP75 JP77 JP79 JP81 JP83 JP85 JP87 JP89 JP91 JP93 JP95 = SparkFun-Connectors

## Nets
GND: C1.C C2.C JP1.1 U1.4
GND1: C3.C C4.C JP3.1 U2.4
GND2: C5.C C6.C JP5.1 U3.4
GND3: C7.C C8.C JP7.1 U4.4
GND4: C9.C C10.C JP9.1 U5.4
GND5: C11.C C12.C JP11.1 U6.4
GND6: C13.C C14.C JP13.1 U7.4
GND7: C15.C C16.C JP15.1 U8.4
GND8: C17.C C18.C JP17.1 U9.4
GND9: C19.C C20.C JP19.1 U10.4
GND10: C21.C C22.C JP21.1 U11.4
GND11: C23.C C24.C JP23.1 U12.4
GND12: C25.C C26.C JP25.1 U13.4
GND13: C27.C C28.C JP27.1 U14.4
GND14: C29.C C30.C JP29.1 U15.4
GND15: C31.C C32.C JP31.1 U16.4
GND16: C33.C C34.C JP33.1 U17.4
GND17: C35.C C36.C JP35.1 U18.4
GND18: C37.C C38.C JP37.1 U19.4
GND19: C39.C C40.C JP39.1 U20.4
GND20: C41.C C42.C JP41.1 U21.4
GND21: C43.C C44.C JP43.1 U22.4
GND22: C45.C C46.C JP45.1 U23.4
GND23: C47.C C48.C JP47.1 U24.4
GND24: C49.C C50.C JP49.1 U25.4
GND25: C51.C C52.C JP51.1 U26.4
GND26: C53.C C54.C JP53.1 U27.4
GND27: C55.C C56.C JP55.1 U28.4
GND28: C57.C C58.C JP57.1 U29.4
GND29: C59.C C60.C JP59.1 U30.4
GND30: C61.C C62.C JP61.1 U31.4
GND31: C63.C C64.C JP63.1 U32.4
GND32: C65.C C66.C JP65.1 U33.4
GND33: C67.C C68.C JP67.1 U34.4
GND34: C69.C C70.C JP69.1 U35.4
GND35: C71.C C72.C JP71.1 U36.4
GND36: C73.C C74.C JP73.1 U37.4
GND37: C75.C C76.C JP75.1 U38.4
GND38: C77.C C78.C JP77.1 U39.4
GND39: C79.C C80.C JP79.1 U40.4
GND40: C81.C C82.C JP81.1 U41.4
GND41: C83.C C84.C JP83.1 U42.4
GND42: C85.C C86.C JP85.1 U43.4
GND43: C87.C C88.C JP87.1 U44.4
GND44: C89.C C90.C JP89.1 U45.4
GND45: C91.C C92.C JP91.1 U46.4
GND46: C93.C C94.C JP93.1 U47.4
GND47: C95.C C96.C JP95.1 U48.4
N$1: D2.A L2.P$2 U2.5
N$2: D3.A L3.P$2 U3.5
N$3: D1.A L1.P$2 U1.5
N$4: D4.A L4.P$2 U4.5
N$5: D5.A L5.P$2 U5.5
N$6: D6.A L6.P$2 U6.5
N$7: D7.A L7.P$2 U7.5
N$8: D8.A L8.P$2 U8.5
N$9: D9.A L9.P$2 U9.5
N$10: D10.A L10.P$2 U10.5
N$11: D11.A L11.P$2 U11.5
N$12: D12.A L12.P$2 U12.5
N$13: D13.A L13.P$2 U13.5
N$14: D14.A L14.P$2 U14.5
N$15: D15.A L15.P$2 U15.5
N$16: D16.A L16.P$2 U16.5
N$17: D17.A L17.P$2 U17.5
N$18: D18.A L18.P$2 U18.5
N$19: D19.A L19.P$2 U19.5
N$20: D20.A L20.P$2 U20.5
N$21: D21.A L21.P$2 U21.5
N$22: D22.A L22.P$2 U22.5
N$23: D23.A L23.P$2 U23.5
N$24: D24.A L24.P$2 U24.5
N$25: D25.A L25.P$2 U25.5
N$26: D26.A L26.P$2 U26.5
N$27: D27.A L27.P$2 U27.5
N$28: D28.A L28.P$2 U28.5
N$29: D29.A L29.P$2 U29.5
N$30: D30.A L30.P$2 U30.5
N$31: D31.A L31.P$2 U31.5
N$32: D32.A L32.P$2 U32.5
N$33: D33.A L33.P$2 U33.5
N$34: D34.A L34.P$2 U34.5
N$35: D35.A L35.P$2 U35.5
N$36: D36.A L36.P$2 U36.5
N$37: D37.A L37.P$2 U37.5
N$38: D38.A L38.P$2 U38.5
N$39: D39.A L39.P$2 U39.5
N$40: D40.A L40.P$2 U40.5
N$41: D41.A L41.P$2 U41.5
N$42: D42.A L42.P$2 U42.5
N$43: D43.A L43.P$2 U43.5
N$44: D44.A L44.P$2 U44.5
N$45: D45.A L45.P$2 U45.5
N$46: D46.A L46.P$2 U46.5
N$47: D47.A L47.P$2 U47.5
N$48: D48.A L48.P$2 U48.5
VIN: C1.A JP1.3 L1.P$1
VIN1: C3.A JP3.3 L2.P$1
VIN2: C5.A JP5.3 L3.P$1
VIN3: C7.A JP7.3 L4.P$1
VIN4: C9.A JP9.3 L5.P$1
VIN5: C11.A JP11.3 L6.P$1
VIN6: C13.A JP13.3 L7.P$1
VIN7: C15.A JP15.3 L8.P$1
VIN8: C17.A JP17.3 L9.P$1
VIN9: C19.A JP19.3 L10.P$1
VIN10: C21.A JP21.3 L11.P$1
VIN11: C23.A JP23.3 L12.P$1
VIN12: C25.A JP25.3 L13.P$1
VIN13: C27.A JP27.3 L14.P$1
VIN14: C29.A JP29.3 L15.P$1
VIN15: C31.A JP31.3 L16.P$1
VIN16: C33.A JP33.3 L17.P$1
VIN17: C35.A JP35.3 L18.P$1
VIN18: C37.A JP37.3 L19.P$1
VIN19: C39.A JP39.3 L20.P$1
VIN20: C41.A JP41.3 L21.P$1
VIN21: C43.A JP43.3 L22.P$1
VIN22: C45.A JP45.3 L23.P$1
VIN23: C47.A JP47.3 L24.P$1
VIN24: C49.A JP49.3 L25.P$1
VIN25: C51.A JP51.3 L26.P$1
VIN26: C53.A JP53.3 L27.P$1
VIN27: C55.A JP55.3 L28.P$1
VIN28: C57.A JP57.3 L29.P$1
VIN29: C59.A JP59.3 L30.P$1
VIN30: C61.A JP61.3 L31.P$1
VIN31: C63.A JP63.3 L32.P$1
VIN32: C65.A JP65.3 L33.P$1
VIN33: C67.A JP67.3 L34.P$1
VIN34: C69.A JP69.3 L35.P$1
VIN35: C71.A JP71.3 L36.P$1
VIN36: C73.A JP73.3 L37.P$1
VIN37: C75.A JP75.3 L38.P$1
VIN38: C77.A JP77.3 L39.P$1
VIN39: C79.A JP79.3 L40.P$1
VIN40: C81.A JP81.3 L41.P$1
VIN41: C83.A JP83.3 L42.P$1
VIN42: C85.A JP85.3 L43.P$1
VIN43: C87.A JP87.3 L44.P$1
VIN44: C89.A JP89.3 L45.P$1
VIN45: C91.A JP91.3 L46.P$1
VIN46: C93.A JP93.3 L47.P$1
VIN47: C95.A JP95.3 L48.P$1
VOUT: C2.A D1.C JP1.2 U1.1 U1.2
VOUT1: C4.A D2.C JP3.2 U2.1 U2.2
VOUT2: C6.A D3.C JP5.2 U3.1 U3.2
VOUT3: C8.A D4.C JP7.2 U4.1 U4.2
VOUT4: C10.A D5.C JP9.2 U5.1 U5.2
VOUT5: C12.A D6.C JP11.2 U6.1 U6.2
VOUT6: C14.A D7.C JP13.2 U7.1 U7.2
VOUT7: C16.A D8.C JP15.2 U8.1 U8.2
VOUT8: C18.A D9.C JP17.2 U9.1 U9.2
VOUT9: C20.A D10.C JP19.2 U10.1 U10.2
VOUT10: C22.A D11.C JP21.2 U11.1 U11.2
VOUT11: C24.A D12.C JP23.2 U12.1 U12.2
VOUT12: C26.A D13.C JP25.2 U13.1 U13.2
VOUT13: C28.A D14.C JP27.2 U14.1 U14.2
VOUT14: C30.A D15.C JP29.2 U15.1 U15.2
VOUT15: C32.A D16.C JP31.2 U16.1 U16.2
VOUT16: C34.A D17.C JP33.2 U17.1 U17.2
VOUT17: C36.A D18.C JP35.2 U18.1 U18.2
VOUT18: C38.A D19.C JP37.2 U19.1 U19.2
VOUT19: C40.A D20.C JP39.2 U20.1 U20.2
VOUT20: C42.A D21.C JP41.2 U21.1 U21.2
VOUT21: C44.A D22.C JP43.2 U22.1 U22.2
VOUT22: C46.A D23.C JP45.2 U23.1 U23.2
VOUT23: C48.A D24.C JP47.2 U24.1 U24.2
VOUT24: C50.A D25.C JP49.2 U25.1 U25.2
VOUT25: C52.A D26.C JP51.2 U26.1 U26.2
VOUT26: C54.A D27.C JP53.2 U27.1 U27.2
VOUT27: C56.A D28.C JP55.2 U28.1 U28.2
VOUT28: C58.A D29.C JP57.2 U29.1 U29.2
VOUT29: C60.A D30.C JP59.2 U30.1 U30.2
VOUT30: C62.A D31.C JP61.2 U31.1 U31.2
VOUT31: C64.A D32.C JP63.2 U32.1 U32.2
VOUT32: C66.A D33.C JP65.2 U33.1 U33.2
VOUT33: C68.A D34.C JP67.2 U34.1 U34.2
VOUT34: C70.A D35.C JP69.2 U35.1 U35.2
VOUT35: C72.A D36.C JP71.2 U36.1 U36.2
VOUT36: C74.A D37.C JP73.2 U37.1 U37.2
VOUT37: C76.A D38.C JP75.2 U38.1 U38.2
VOUT38: C78.A D39.C JP77.2 U39.1 U39.2
VOUT39: C80.A D40.C JP79.2 U40.1 U40.2
VOUT40: C82.A D41.C JP81.2 U41.1 U41.2
VOUT41: C84.A D42.C JP83.2 U42.1 U42.2
VOUT42: C86.A D43.C JP85.2 U43.1 U43.2
VOUT43: C88.A D44.C JP87.2 U44.1 U44.2
VOUT44: C90.A D45.C JP89.2 U45.1 U45.2
VOUT45: C92.A D46.C JP91.2 U46.1 U46.2
VOUT46: C94.A D47.C JP93.2 U47.1 U47.2
VOUT47: C96.A D48.C JP95.2 U48.1 U48.2